# Altium PCB LEDPanel.PcbDoc
Units mm, origin at the board's own origin, x right, y up, seen from the top; angles counter-clockwise.
Board outline 99.44 x 62.86 mm, 4 copper layers (Top Layer, Mid Layer 1, Mid Layer 2, Bottom Layer), stack 1.57 mm thick; 52 components, 27 nets, 155 pads, 123 vias.
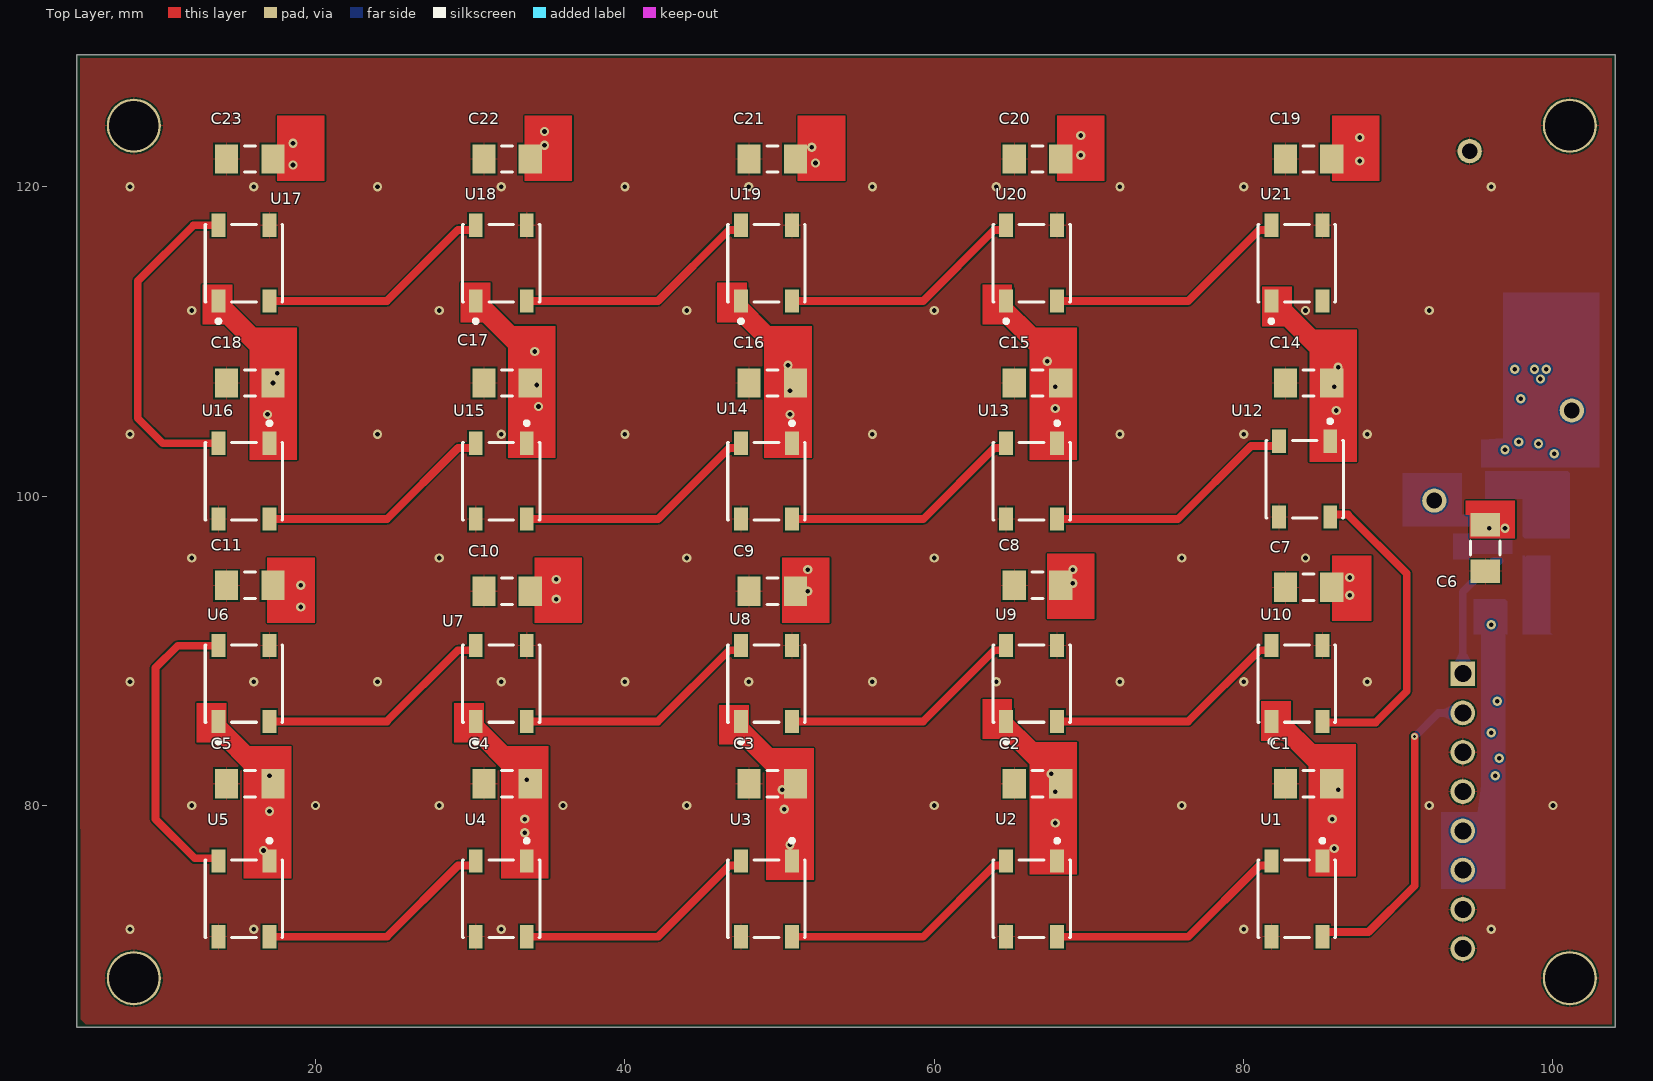
[diagram p0: Top Layer view]
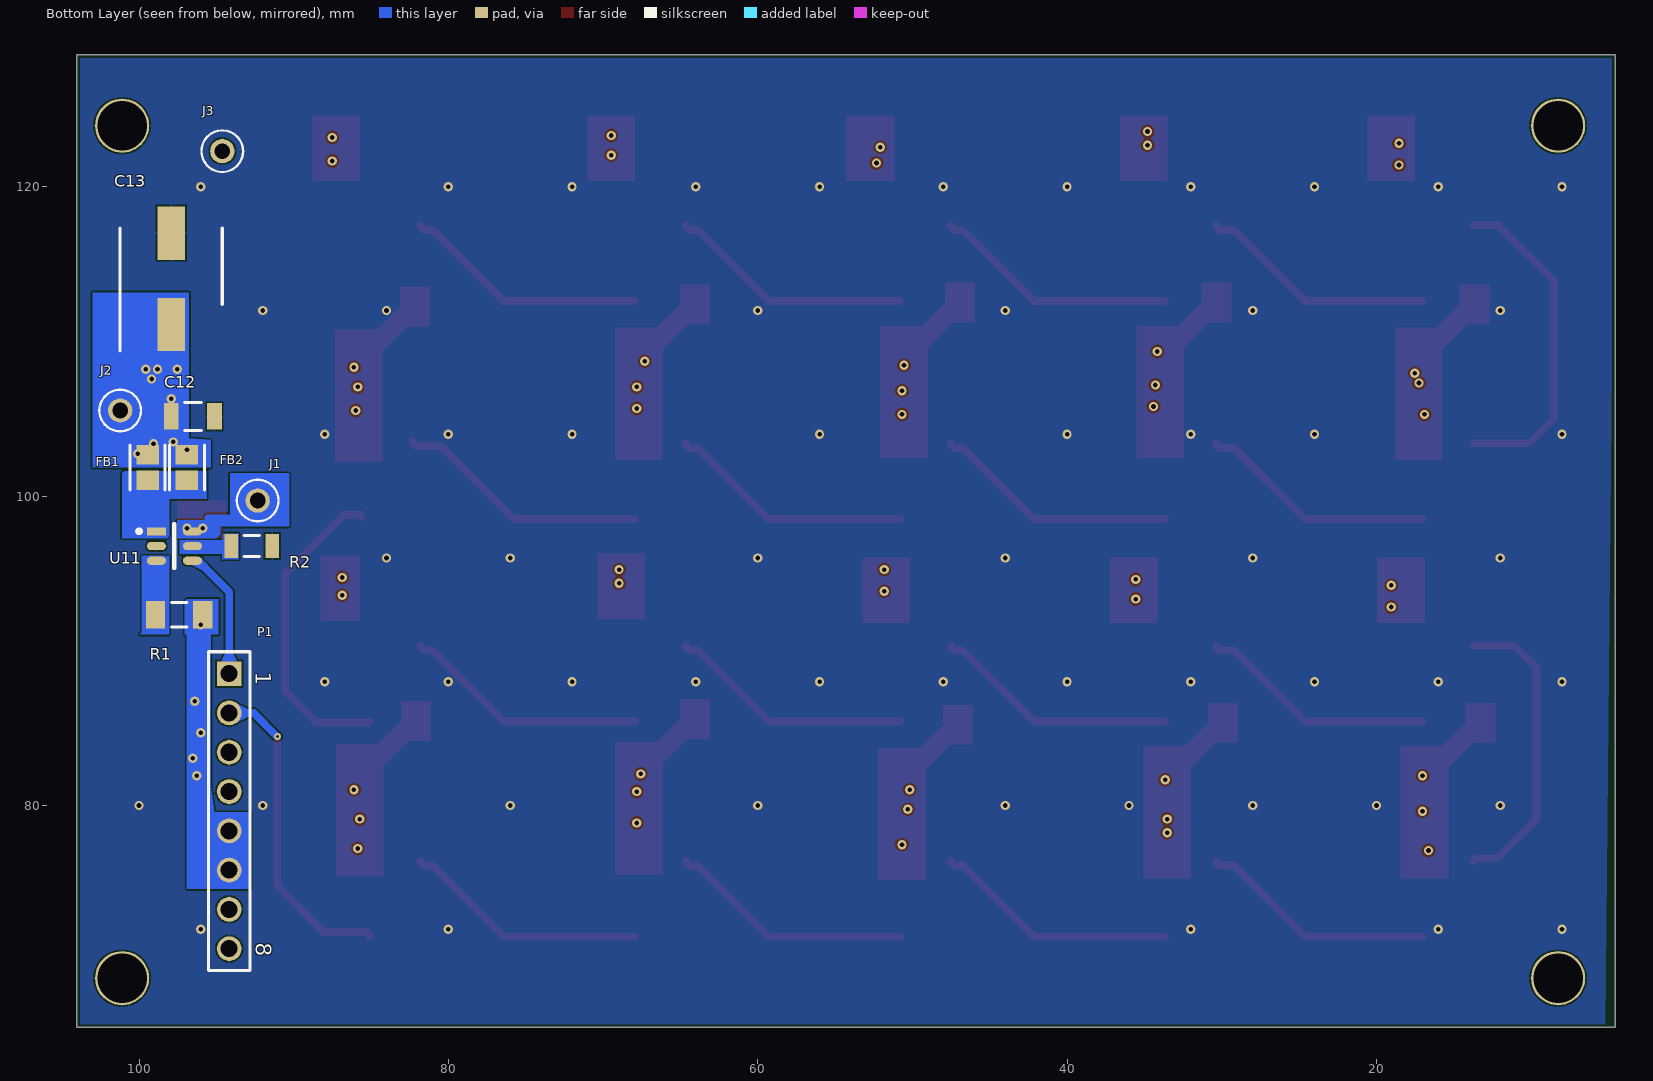
[diagram p1: Bottom Layer view, seen from below]
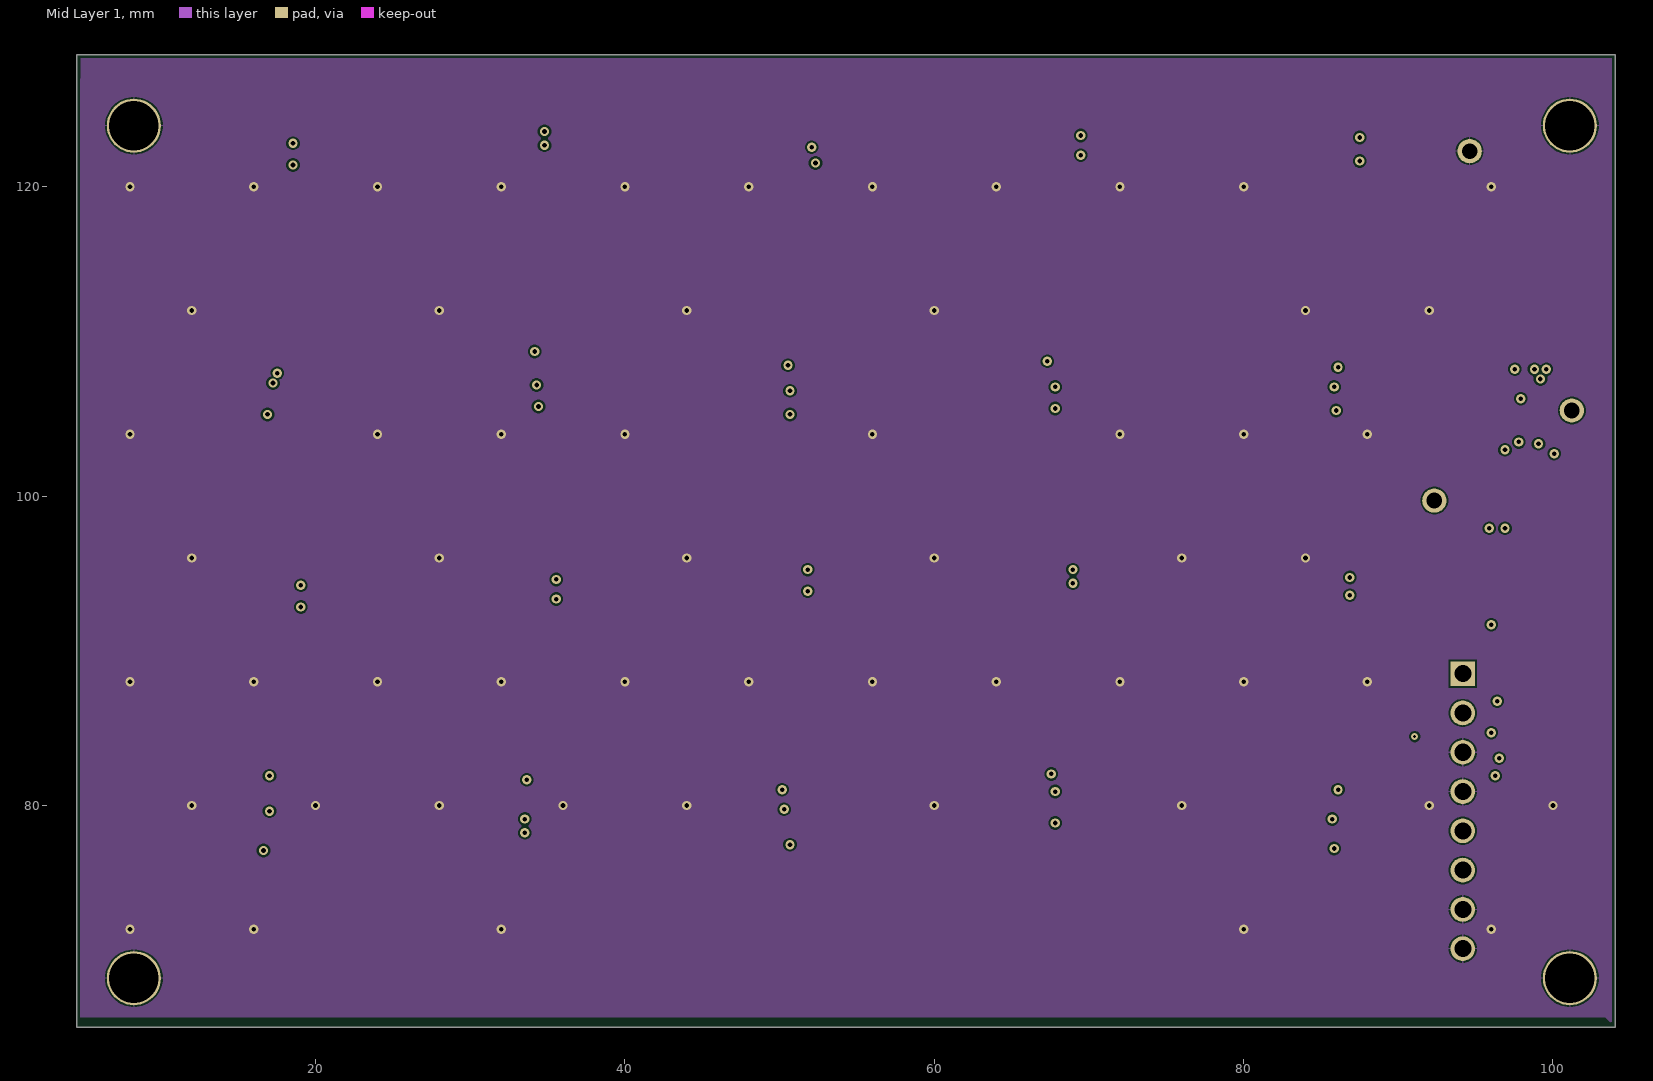
[diagram p2: Mid Layer 1]
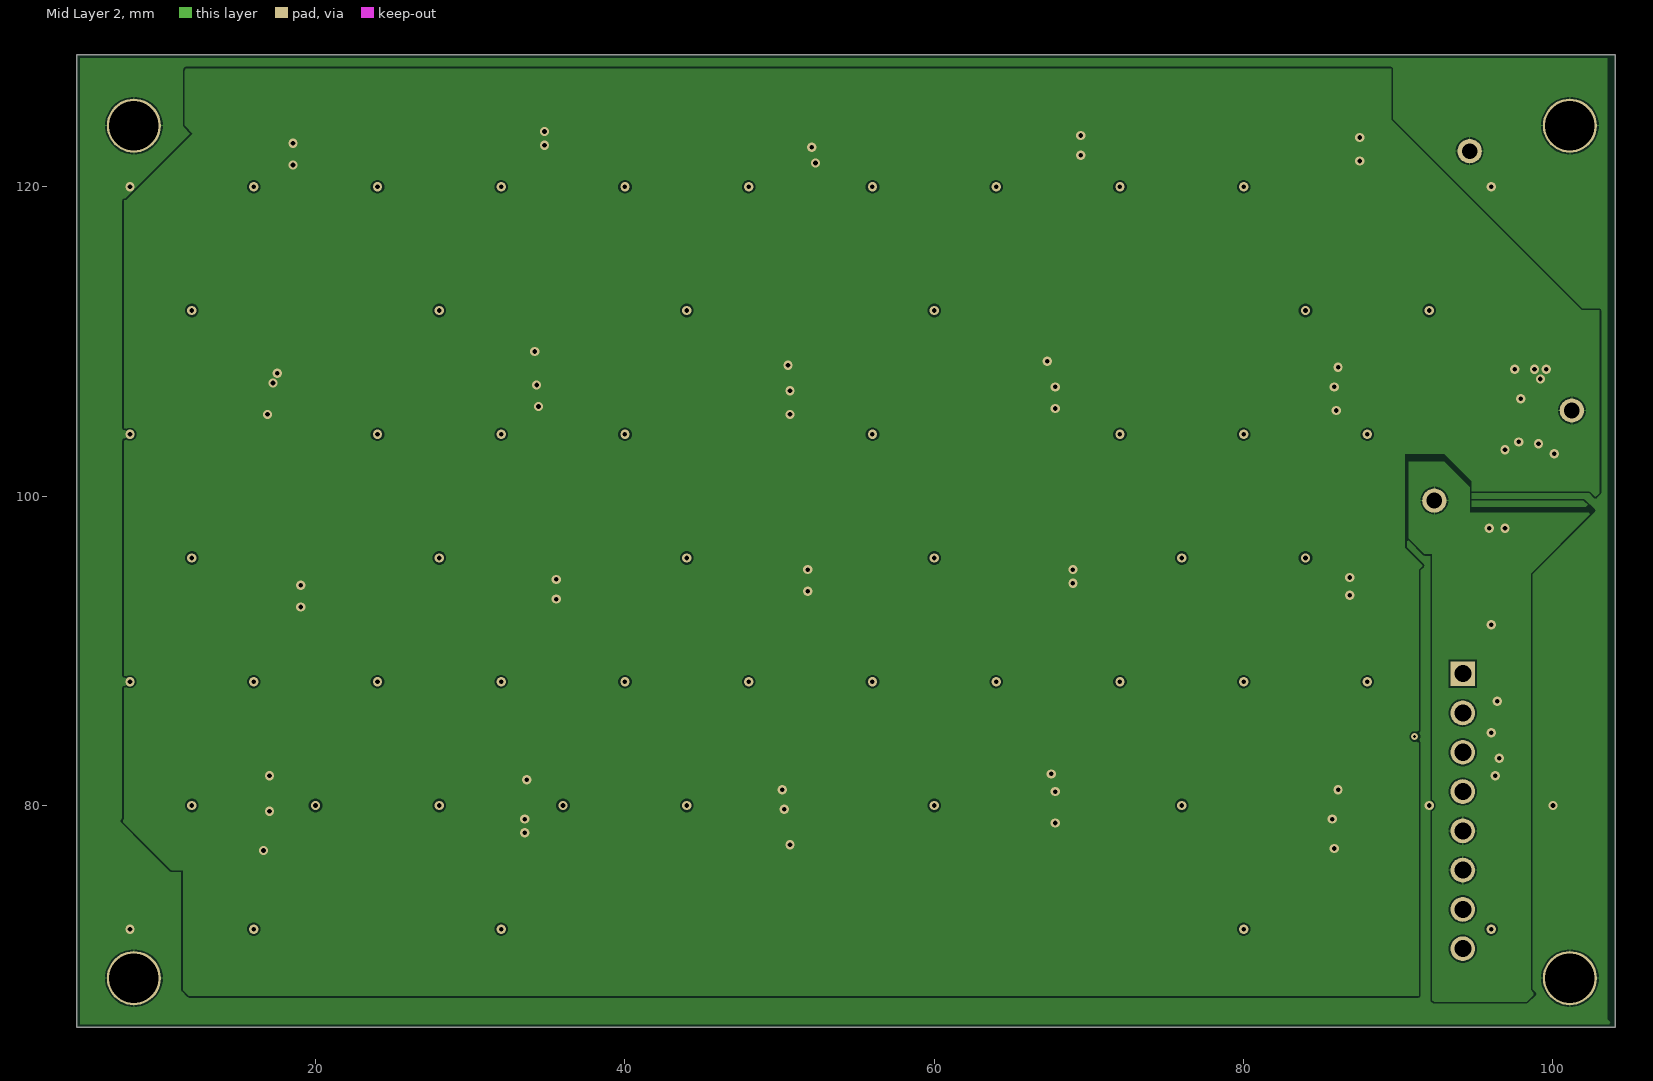
[diagram p3: Mid Layer 2]
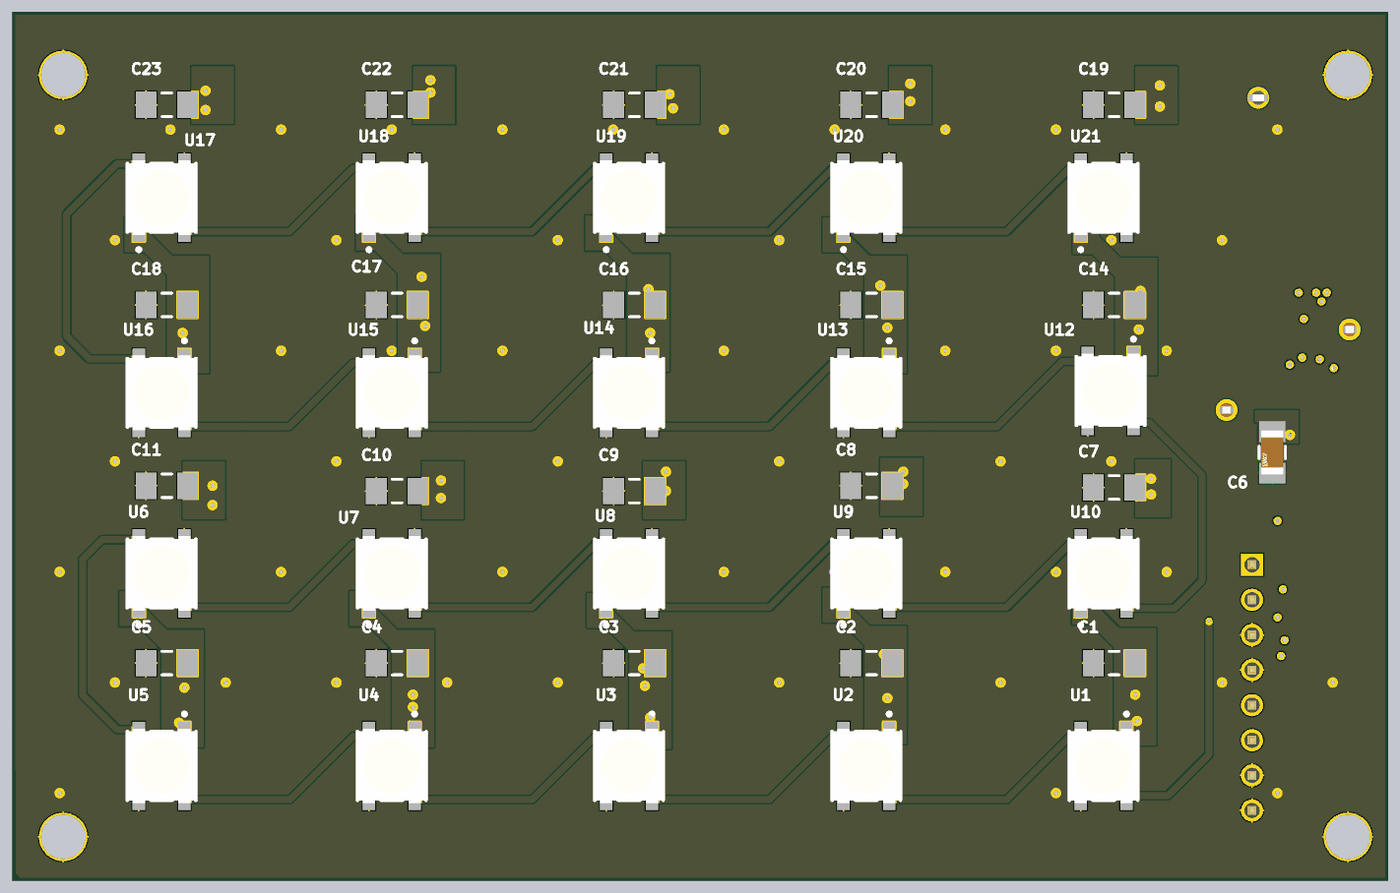
[diagram p4: 3D render of the assembled board from above, using the file's embedded part models]
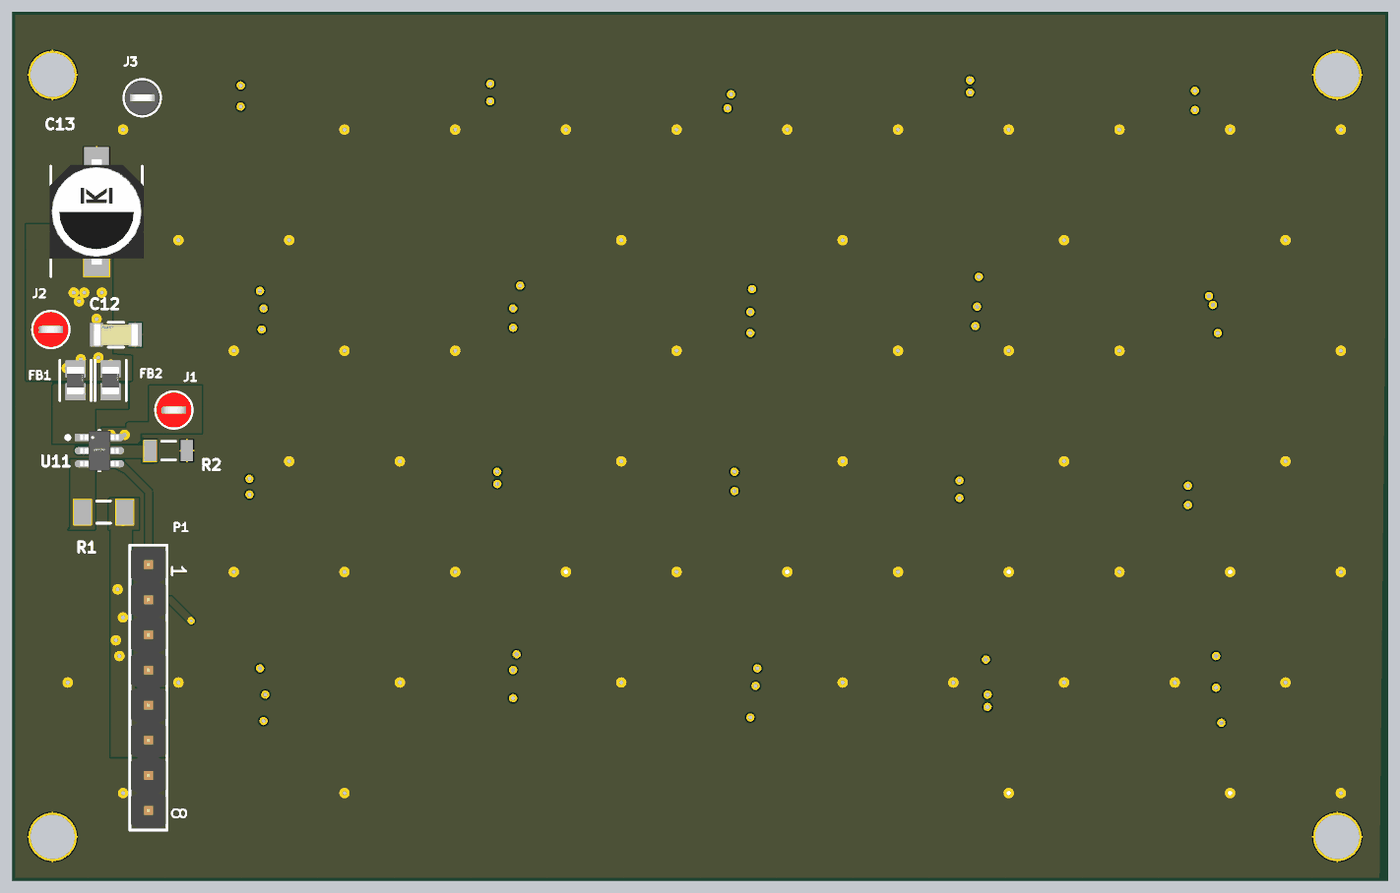
[diagram p5: 3D render of the assembled board from below, using the file's embedded part models]

## Layer stack, top to bottom
Top Solder: solder mask 0.0127, Solder Resist, Dk 3.8
Top Layer: signal copper 0.035
Dielectric 1: prepreg 0.1, 2313, Dk 4.05
Mid Layer 1: signal copper 0.0175
Core: core 1.265, FR-4, Dk 4.5
Mid Layer 2: signal copper 0.0175
Dielectric 2: prepreg 0.1, 2313, Dk 4.05
Bottom Layer: signal copper 0.035
Bottom Solder: solder mask 0.0127, Solder Resist, Dk 3.8

## Board outline
4.572,65.659 104.013,65.659 104.013,128.524 4.572,128.524

## Design rules (kind name [scope] priority, off if disabled: settings)
BoardOutlineClearance [All] p1: gap=0.2 ignorepadtopadclearanceinfootprint=FALSE
Clearance [All] p1: gap=0.102 ignorepadtopadclearanceinfootprint=FALSE except(0.127: Arc-Via Track-Via SMDPad-Via THPad-Via Via-Via Via-Fill Via-Poly Via-Region Via-Text; 0.25: Arc-Hole Track-Hole SMDPad-Hole THPad-Hole Via-Hole Fill-Hole Poly-Hole Region-Hole Text-Hole)
ComponentClearance [All] p1: gap=0.102 collisioncheckmode=3 verticalgap=0.102 showdistances=TRUE
DiffPairsRouting [All] p1: maxlimit=0.102 minlimit=0.102 mostfreqgap=0.102 toplayer_minwidth=0.102 toplayer_maxwidth=1816.048 toplayer_prefwidth=0.102 midlayer1_minwidth=0.102 midlayer1_maxwidth=1816.048 midlayer1_prefwidth=0.102 midlayer2_minwidth=0.102 midlayer2_maxwidth=1816.048 midlayer2_prefwidth=0.102 bottomlayer_minwidth=0.102 bottomlayer_maxwidth=1816.048 bottomlayer_prefwidth=0.102 maxuncoupledlength=12.7
Height [All] p1: minheight=0 maxheight=1816.048 prefheight=12.7
HoleSize [All] p1: absolutevalues=TRUE maxlimit=6.3 minlimit=0.2 maxpercent=80.000 minpercent=20.000
HoleToHoleClearance [All] p1: gap=0.25 allowstackedmicrovias=FALSE
MinimumAnnularRing [All] p1: minimumring=0.076
MinimumSolderMaskSliver [All] p1: minsoldermaskwidth=0
PlaneClearance [All] p1: clearance=0.102
PlaneConnect PlaneConnectPowerPads [InPadClass('PowerPads')] p1: planeconnectstyle=Direct reliefexpansion=0.508 reliefentries=4 reliefconductorwidth=0.254 reliefairgap=0.254
PlaneConnect [All] p2: pad.planeconnectstyle=Relief pad.reliefexpansion=0.3 pad.reliefentries=4 pad.reliefconductorwidth=0.102 pad.reliefairgap=0.102 via.planeconnectstyle=Direct via.reliefexpansion=0.3 via.reliefentries=4 via.reliefconductorwidth=0.127 via.reliefairgap=0.127
PolygonConnect PolygonConnectPowerPads [All vs (InPadClass('PowerPads'))] p1: connectstyle=Direct reliefconductorwidth=0.254 reliefentries=4 polygonreliefangle="90 Angle" airgapwidth=0.254
PolygonConnect [All] p2: thpad.connectstyle=Relief thpad.reliefconductorwidth=0.102 thpad.reliefentries=4 thpad.polygonreliefangle="90 Angle" thpad.airgapwidth=0.102 smdpad.connectstyle=Relief smdpad.reliefconductorwidth=0.102 smdpad.reliefentries=4 smdpad.polygonreliefangle="90 Angle" smdpad.airgapwidth=0.102 via.connectstyle=Direct via.reliefconductorwidth=0.127 via.reliefentries=4 via.polygonreliefangle="90 Angle" via.airgapwidth=0.127
RoutingVias [All] p1: holewidth=0.2 width=0.45 viastyle="Through Hole" minholewidth=0.2 minwidth=0.45 maxholewidth=6.3 maxwidth=6.55
SilkToSilkClearance [All] p1: silktosilkclearance=0
SilkToSolderMaskClearance [IsPad] p1: minsilkscreentomaskgap=0.102 clearancetoexposedcopper=TRUE
SolderMaskExpansion [All] p1: expansion=0.075 istentingtop=FALSE
Width [All] p1: maxlimit=1816.048 minlimit=0.102 preferedwidth=0.102
20 further rules are at their usual default settings.

## Classes and differential pairs
component class "digital led panel": C1 C2 C3 C4 C5 C6 C7 C8 C9 C10 C11 C12 C13 C14 C16 C17 C18 C19 C20 C21 C22 C23 FB1 FB2 J1 J2 J3 P1 R1 R2 U1 U2 U4 U5 U6 U7 U8 U9 U10 U11 U12 U13 U14 U15 U16 U18 U19 U20 U21

## Components (designator, comment, footprint, x,y, rotation, side; value= is the part's Value field where it differs from the comment)
C1 "100nF" KEMT-1206-2_M 84.201,81.407 r0 top
C2 "100nF" KEMT-1206-2_M 66.675,81.407 r0 top
C3 "100nF" KEMT-1206-2_M 49.53,81.407 r0 top
C4 "100nF" KEMT-1206-2_M 32.385,81.407 r0 top
C5 "100nF" KEMT-1206-2_M 15.748,81.407 r0 top
C6 "10uF" FP-1206-L_3_2_0_2-W_1_6_0-IPC_A 95.631,96.647 r270 top
C7 "100nF" KEMT-1206-2_M 84.201,94.107 r0 top
C8 "100nF" KEMT-1206-2_M 66.675,94.234 r0 top
C9 "100nF" KEMT-1206-2_M 49.53,93.853 r0 top
C10 "100nF" KEMT-1206-2_M 32.385,93.853 r0 top
C11 "100nF" KEMT-1206-2_M 15.748,94.234 r0 top
C12 "0.1uF" FP-C1206C-EB-MFG 96.52,105.156 r180 bottom value="0.10 μF"
C13 "100uF" CAPAE660X565N 97.917,114.046 r90 bottom
C14 "100nF" KEMT-1206-2_M 84.201,107.315 r0 top
C15 "100nF" KEMT-1206-2_M 66.675,107.315 r0 top
C16 "100nF" KEMT-1206-2_M 49.53,107.315 r0 top
C17 "100nF" KEMT-1206-2_M 32.385,107.315 r0 top
C18 "100nF" KEMT-1206-2_M 15.748,107.315 r0 top
C19 "100nF" KEMT-1206-2_M 84.201,121.793 r0 top
C20 "100nF" KEMT-1206-2_M 66.675,121.793 r0 top
C21 "100nF" KEMT-1206-2_M 49.53,121.793 r0 top
C22 "100nF" KEMT-1206-2_M 32.385,121.793 r0 top
C23 "100nF" KEMT-1206-2_M 15.748,121.793 r0 top
FB1 "15m" FP-BLM21-0_2-t0_85-e0_5-d-IPC_B 99.441,101.854 r90 bottom
FB2 "15m" FP-BLM21-0_2-t0_85-e0_5-d-IPC_B 96.901,101.854 r90 bottom
J1 "5000" FP-5000-MFG 92.329,99.713 r180 bottom
J2 "5000" FP-5000-MFG 101.219,105.537 r180 bottom
J3 "5001" FP-5001-MFG 94.615,122.301 r180 bottom
P1 "61300811121" 61300811121 94.167,79.632 r270 bottom
R1 "10K" RESC3116X65X40ML10T20 97.409,92.329 r180 bottom
R2 "3.4K" RESC3216X70X50LL05T20 92.71,96.774 r0 bottom
U1 "1655" ADA-RGB-1655_V 83.439,73.969 r270 top
U2 "1655" ADA-RGB-1655_V 66.294,73.969 r270 top
U3 "1655" ADA-RGB-1655_V 49.149,73.969 r270 top
U4 "1655" ADA-RGB-1655_V 32.004,73.969 r270 top
U5 "1655" ADA-RGB-1655_V 15.367,73.969 r270 top
U6 "1655" ADA-RGB-1655_V 15.367,87.884 r90 top
U7 "1655" ADA-RGB-1655_V 32.004,87.884 r90 top
U8 "1655" ADA-RGB-1655_V 49.149,87.884 r90 top
U9 "1655" ADA-RGB-1655_V 66.294,87.884 r90 top
U10 "1655" ADA-RGB-1655_V 83.439,87.884 r90 top
U11 "AP22615AWU-7" FP-TSOT26-IPC_B 97.709,96.774 r180 bottom
U12 "1655" ADA-RGB-1655_V 83.947,101.092 r270 top
U13 "1655" ADA-RGB-1655_V 66.294,100.965 r270 top
U14 "1655" ADA-RGB-1655_V 49.149,100.965 r270 top
U15 "1655" ADA-RGB-1655_V 32.004,100.965 r270 top
U16 "1655" ADA-RGB-1655_V 15.367,100.965 r270 top
U17 "1655" ADA-RGB-1655_V 15.367,115.062 r90 top
U18 "1655" ADA-RGB-1655_V 32.004,115.062 r90 top
U19 "1655" ADA-RGB-1655_V 49.149,115.062 r90 top
U20 "1655" ADA-RGB-1655_V 66.294,115.062 r90 top
U21 "1655" ADA-RGB-1655_V 83.439,115.062 r90 top

## Footprints (in the part's own frame and the unit in brackets; to place one, negate y for a bottom-side part, rotate by r counter-clockwise, add the part's x,y. Pads: shape width x height; smd on the part's side, far side on the other; paste and mask are expansions set on the pad)
61300811121 [mm] "Pin Header, pitch 2.54 mm, THT, Vertical, single row, 8p"
  rect 1.6x1.6 hole 1.1: 1(-8.89,0)
  round 1.6 hole 1.1: 2(-6.35,0) 3(-3.81,0) 4(-1.27,0) 5(1.27,0) 6(3.81,0) 7(6.35,0) 8(8.89,0)
  silkscreen extent -10.31,-1.35 10.31,1.35, body extent -10.16,-1.27 10.16,1.27, height 8.57
ADA-RGB-1655_V [mm] "SMD, 4-Leads, Body 5x5mm"
  rect 1.5x0.9 smd: 1(-2.45,1.65) 2(-2.45,-1.65) 3(2.45,-1.65) 4(2.45,1.65)
  silkscreen extent -3.87,-2.5 2.5,2.5, body extent -2.7,-2.5 2.7,2.5, height 1.68
CAPAE660X565N [mm]
  rect 3.45x1.8 smd: 1(-2.95,0) 2(2.95,0)
  silkscreen extent -4.67,-3.3 3.3,3.3, body extent -3.8,-3.4 3.8,3.4, height 5.66
FP-1206-L_3_2_0_2-W_1_6_0-IPC_A [mm]
  rect 1.505x1.906 smd paste+0 mask+0: 1(-1.501,0) 2(1.501,0)
  silkscreen extent -0.45,-0.95 0.45,0.95, body extent -1.6,-0.8 1.6,0.8, height 2.29
FP-5000-MFG [mm]
  round 1.57 hole 1.02 paste-1000 mask+0: 1(0,0)
  silkscreen extent -1.35,-1.34 1.35,1.34, body extent -1.27,-1.26 1.27,1.26, height 6.32
FP-5001-MFG [mm]
  round 1.57 hole 1.016 paste-1000 mask+0: 1(0,0)
  silkscreen extent -1.35,-1.34 1.35,1.34, body extent -1.27,-1.27 1.27,1.27, height 4.72
FP-BLM21-0_2-t0_85-e0_5-d-IPC_B [mm]
  rect 1.255x1.456 smd paste+0 mask+0: 1(-0.826,0) 2(0.826,0)
  silkscreen extent -1.45,-1.13 1.45,1.13, body extent -1,-0.63 1,0.63, height 1.05
FP-C1206C-EB-MFG [mm]
  rect 0.95x1.7 smd paste+0 mask+0: 1(-1.4,0) 2(1.4,0)
  silkscreen extent -0.55,-0.9 0.55,0.9, body extent -1.6,-0.8 1.6,0.8, height 0.88
FP-TSOT26-IPC_B [mm]
  rect 1.24x0.526 smd paste+0 mask+0: 1(-1.165,0.95)
  rrect100% 1.24x0.526 smd paste+0 mask+0: 2(-1.165,0) 3(-1.165,-0.95) 4(1.166,-0.95) 5(1.166,0) 6(1.166,0.95)
  silkscreen extent -2.41,-1.45 0.05,1.45, body extent -1.4,-1.45 1.4,1.45, height 1
KEMT-1206-2_M [mm] "SMD, 2-Leads, Body 3.4x1.8mm, IPC Low Density"
  rect 1.5x1.9 smd: 1(-1.5,0) 2(1.5,0)
  silkscreen extent -0.35,-0.85 0.35,0.85, body extent -1.7,-0.9 1.7,0.9, height 0.88
RESC3116X65X40ML10T20 [mm] "Chip Resistor, 2-Leads, Body 3.10x1.60mm, IPC Low Density"
  rect 1.25x1.8 smd: 1(-1.525,0) 2(1.525,0)
  silkscreen extent -0.5,-0.8 0.5,0.8, body extent -1.6,-0.85 1.6,0.85, height 0.65
RESC3216X70X50LL05T20 [mm] "Chip Resistor, 2-Leads, Body 3.20x1.60mm, IPC High Density"
  rect 0.9x1.55 smd: 1(-1.325,0) 2(1.325,0)
  silkscreen extent -0.5,-0.67 0.5,0.67, body extent -1.63,-0.82 1.62,0.82, height 0.7

## Part data
C1 C2 C3 C4 C5 C7 C8 C9 C10 C11 C14 C15 C16 C17 C18 C19 C20 C21 C22 C23: library part CMP-1037-04202-2, "CAP, Ceramic, 0.1 uF, +/- 10%, 50 V, -55 to 125 degC, 1206 (3216 Metric), RoHS, Tape and Reel", Capacitance=0.1µF, Capacitance Tolerance=±10%, Capacitor Case Style=1206[3216Metric], Dielectric Characteristic=X7R, Manufacturer=Kemet, Operating Temperature Max=125degC, Operating Temperature Min=-55degC, Package Description="2-Leads SMD, Body 3.2 x 1.6 mm", Package Reference=1206-2, Voltage Rating=50V, Datasheet URL=https://datasheet.ciiva.com/6125/1725438-6125494.pdf, Datasheet Version=Jul-13, Manufacturer URL=http://www.kemet.com/, Packaging=Tape&Reel, Product Range=KEMET-CSeries, SVHC=ToBeAdvised
C6: library part CMP-04427-021870-1, "General Purpose Ceramic Capacitor, 1206, 10uF, 10%, X5R, 15%, 10V", Case Code (Imperial)=1206, Case Code (Metric)=3216, Dielectric=X5R, Max Operating Temperature=85°C, Min Operating Temperature=-55°C, Package Quantity=1, Tolerance=10%, Voltage=10V, Capacitance=10uF, Case/Package=1206, Construction=Flat, Contact Plating=Tin, Depth=1.6mm, Height=0.07mm, Lead Free="Lead Free", Length=3.2mm, Mount="Surface Mount", Number of Pins=2, Packaging="Tape and Reel", Radiation Hardening=No, REACH SVHC="No SVHC", RoHS Compliant=Yes, Series=-, Size=1.78mm, Termination=SMD/SMT, Thickness=0.07inch, Voltage Rating=10V, Voltage Rating (DC)=10V, Width=0.063inch
C12: library part CMP-03020-000153-1, "CAP CER 0.1UF 100V X7R 1206", Capacitance="0.10 μF", Manufacturer=KEMET, Manufacturer Part Number=C1206C104K1RACTU, Package=C1206C-EB, Temperature="-55°C to +150°C", Temperature Characteristic=X7R, Temperature Coefficient=15%, Temperature Range High=+150°C, Temperature Range Low=-55°C, Tolerance=0.1, Voltage Rating="100 V", Automotive=Yes, Automotive Grade="Grade 0", Category=Cap, ComponentLink2Description=Datasheet, ComponentLink2URL=https://content.kemet.com/datasheets/KEM_C1007_X8R_ULTRA_150C_SMD.pdf, Device Class L1="Passive Components", Device Class L2=Capacitors, Device Class L3="Ceramic Capacitors", Digikey Description="CAP CER 0.1UF 100V X7R 1206", Height=0.88mm, Ipc Land Pattern Name=CAPC320160X78, Lead Free=Yes, Material=Ceramic, Mouser Description="CAP CER 0.1UF 100V X7R 1206", Octopart=https://octopart.com/c1206c104k1ractu-kemet-89521, RoHS=TRUE
C13: library part EEV107M016S9GAA, "Capacitor Polarised", Manufacturer_Name=KEMET, Mouser Part Number=80-EEV107M016S9GAA, Arrow Part Number=EEV107M016S9GAA, Arrow Price/Stock=https://www.arrow.com/en/products/eev107m016s9gaa/kemet-corporation?region=nac, Datasheet Link=https://content.kemet.com/datasheets/KEM_A4002_EEV.pdf, Height=5.65mm, Manufacturer_Part_Number=EEV107M016S9GAA, Mouser Price/Stock=https://www.mouser.co.uk/ProductDetail/KEMET/EEV107M016S9GAA?qs=E9QF1UCAUX60VYOwNzsOEA%3D%3D
FB1 FB2: library part CMP-06046-001820-1, "Chip Ferrite Bead, 0805, 30Ω @ 100MHz, 0.014Ω, , 4A", Case Code (Imperial)=0805, Case Code (Metric)=2012, Current Rating=3A, DC Resistance (DCR)=14mR, DC Resistance-Max=15MR, Max Current Rating=4A, Max Operating Temperature=125°C, Min Operating Temperature=-55°C, Package Quantity=4000, Ratings=AEC-Q200, Test Frequency=100MHz, Tolerance=25%, Case/Package=0805, Core Material=Ferrite, Depth=1.45mm, Height=0.041inch, Impedance=30R, Lead Free="Lead Free", Length=2mm, Material=Steel, Max DC Current=3A, Mount="Surface Mount", Number of Circuits=1, Number of Lines=1, Packaging="Tape and Reel", REACH SVHC="No SVHC", RoHS Compliant=Yes, Series="EMIFIL®, BLM21P", Shielding=Unshielded, Termination=SMD/SMT, Weight=0.000194oz, Width=1.25mm
J1 J2: library part CMP-19636-000027-1, "PC TEST POINT MINIATURE RED", Color=Red, Flammability Rating="UL94 V-0", Package Quantity=100, Body Material=Bronze, Contact Material=Bronze, Contact Plating=Tin, Height=0.3inch, Hole Diameter=1.6mm, Housing Color=Red, Inside Diameter=1.27mm, Insulation=Insulated, Lead Free="Lead Free", Length=7.62mm, Material=Nylon, Mount=PCB, Number of Contacts=1, Number of Ports=1, Orientation=Straight, Outside Diameter=2.54mm, Packaging=Bulk, Plating=Silver, REACH SVHC="No SVHC", RoHS Compliant=Yes, Series=THM
J3: library part CMP-2000-05181-2, "PC TEST POINT MINIATURE BLACK", Color=Black, Flammability Rating="UL94 V-0", Package Quantity=100, Body Material=Bronze, Contact Material=Bronze, Contact Plating=Silver, Diameter=2.54mm, Height=0.3inch, Hole Diameter=1.6mm, Housing Color=Black, Inside Diameter=1.27mm, Insulation=Insulated, Insulation Material=Nylon, Lead Free="Lead Free", Length=7.62mm, Material=Nylon, Mount="Through Hole", Number of Contacts=1, Number of Ports=1, Orientation=Straight, Outside Diameter=2.54mm, Packaging=Bulk, Plating=Silver, REACH SVHC="No SVHC", RoHS Compliant=Yes, Series=THM, Termination="Through Hole"
P1: library part CMP-1502-01076-1, "THT Vertical Pin Header WR-PHD, Pitch 2.54 mm, Single Row, 8 pins", Contact Resistance=20mOhm, Manufacturer="Wurth Elektronik", Operating Temperature=-40to105degC, Rated Current=3A, Withstanding Voltage=500VAC, Working Voltage=250VAC, Datasheet URL=https://katalog.we-online.de/em/datasheet/6130xx11121.pdf, Gender=Male, Manufacturer URL=http://www.we-online.de, Mounting Technology=THT, Orientation=Vertical, Package Reference=61300811121, Packaging=Bag, Part Number=61300811121, Pin Number=8, Pitch=2.54mm, Publisher=WurthElektronik, Row Number=Single
R1: library part CMP-1014-00623-2, "Chip Resistor, 10 KOhm, +/- 1%, 0.25 W, -55 to 155 degC, 1206 (3216 Metric), RoHS, Tape and Reel", Case Code (Imperial)=1206, Case Code (Metric)=3216, Manufacturer=Yageo, Max Operating Temperature=155degC, Min Operating Temperature=-55degC, Package Description="2-Pin Surface Mount Device, Body 3.1 x 1.6 mm", Package Quantity=5000, Package Reference=1206.0, Power Rating=250mW, Resistance=10KOhm, Temperature Coefficient=100ppm/degreesC, Tolerance=1%, Voltage Rating=200V, Case/Package=1206, Composition=ThickFilm, Datasheet URL=http://www.yageo.com/NewPortal/yageodocoutput?fileName=/pdf/R-Chip/PYu-RC_Group_51_RoHS_L_5.pdf, Datasheet Version="Rev. 5, 10/2016", Depth=1.6mm, Height=0.55mm, Lead Free=LeadFree, Length=3.1mm, Manufacturer URL=http://www.yageo.com/, Military Standard=Not, Packaging=TapeandReel, REACH SVHC=Unknown, RoHSCompliant=true, Termination=SMD/SMT, Width=1.6mm
R2: library part CMP-2003-00314-1, Manufacturer=Panasonic, Part Number=ERJ-8ENF3401V
U1 U2 U3 U4 U5 U6 U7 U8 U9 U10 U12 U13 U14 U15 U16 U17 U18 U19 U20 U21: library part CMP-2000-05026-1, "Intelligent Control LED Integrated Light Source, 3.5 to 5.3 V, -25 to 80 degC, 4-Pin SMD, RoHS, Tape and Reel", Color=Red,Green,Blue(RGB), Manufacturer=Adafruit-Industries-LLC, Package Description="4-Pin Surface Mount Device, Body 5 x 5 mm", Category=Optoelectronics, Configuration=Discrete, Controller Type=-, Datasheet URL=http://datasheet.octopart.com/ADA1655-Adafruit-Industries-datasheet-32028139.pdf, Datasheet Version=May-13, Family=Addressable,Specialty, Interface=-, Manufacturer URL=https://www.adafruit.com/, Mounting Type=SurfaceMount, Number of LEDs=10, Package Reference=1655, Series=Neopixel, Size / Dimension=5.00mmLx5.00mmW, Utilized LED=WS2812(5050)
U11: library part CMP-12757-000023-1, "IC PWR SWTCH N/P-CHAN 1:1 TSOT26", RoHS Compliant=Yes

## Free pads (board coordinates)
  round 3.5 hole 3.2: 1(8.255,123.952) 2(8.255,68.834) 3(101.092,68.834) 4(101.092,123.952)

## Via types
v1: diameter 0.6, hole 0.3, Top Layer to Bottom Layer, 66 vias
v2: diameter 0.6/0.6/0.6/0.6 (per signal layer), hole 0.3, Top Layer to Bottom Layer, 56 vias
v3: diameter 0.45, hole 0.2, Top Layer to Bottom Layer, 1 vias

## Nets (pads, with @x,y where several pads share a name; then routed paths per layer and width w, separated by ;. In a path a pad name is that pad's centre, name@x,y a point inside that pad or via, vN(x,y) a via of type N, cw(c..) or ccw(c..) an arc to the next point about the centre after c; other vN are vias at no path point)
DIN: P1.2 U1.4 | length 20.8
  Top Layer w0.5: U1.4 85.089,71.619 85.289,71.819 88.075,71.819 91.059,74.803 v3(91.059,84.455)
  Bottom Layer w0.5: v3(91.059,84.455) 92.586,85.982 P1.2
DMOS: P1.1 U11.4 | length 8.5
  Bottom Layer w0.5: P1.1 94.167,93.805 96.186,95.824 U11.4
GND: C1.1 C2.1 C3.1 C4.1 C5.1 C6.2 C7.1 C8.1 C9.1 C10.1 C11.1 C12.2 C13.2 C14.1 C15.1 C16.1 C17.1 C18.1 C19.1 C20.1 C21.1 C22.1 C23.1 J3.1 P1.3 P1.4 P1.7 P1.8 pad.1 pad.2 pad.3 pad.4 R2.1 U1.3 U2.3 U3.3 U4.3 U5.3 U6.3 U7.3 U8.3 U9.3 U10.3 U11.2 U12.3 U13.3 U14.3 U15.3 U16.3 U17.3 U18.3 U19.3 U20.3 U21.3
  other v2: 8,72 16,72 32,72 80,72 96,72 12,80 20,80 28,80 36,80 44,80 60,80 76,80 92,80 100,80 8,88 16,88 24,88 32,88 40,88 48,88 56,88 64,88 72,88 80,88 88,88 12,96 28,96 44,96 60,96 76,96 84,96 8,104 24,104 32,104 40,104 56,104 72,104 80,104 88,104 12,112 28,112 44,112 60,112 84,112 92,112 8,120 16,120 24,120 32,120 40,120 48,120 56,120 64,120 72,120 80,120 96,120
NetFB1_1: FB1.1 FB2.1 U11.1
NetR1_1: R1.1 U11.3
NetR2_2: R2.2 U11.5
NetU1_2: U1.2 U2.4 | length 15.9
  Top Layer w0.5: U2.4 76.427,71.519 81.027,76.119 81.589,76.119 81.789,76.319 U1.2
NetU2_2: U2.2 U3.4 | length 15.9
  Top Layer w0.5: U3.4 59.282,71.519 63.882,76.119 64.444,76.119 64.644,76.319 U2.2
NetU3_2: U3.2 U4.4 | length 15.9
  Top Layer w0.5: U4.4 42.137,71.519 46.737,76.119 47.299,76.119 47.499,76.319 U3.2
NetU4_2: U4.2 U5.4 | length 15.4
  Top Layer w0.5: U5.4 24.611,71.519 29.211,76.119 30.154,76.119 30.354,76.319 U4.2
NetU5_2: U5.2 U6.4 | length 19.6
  Top Layer w0.5: U5.2 13.555,76.581 12.192,76.581 9.652,79.121 9.652,88.9 11.086,90.334 U6.4
NetU6_2: U6.2 U7.4 | length 15.4
  Top Layer w0.5: U6.2 24.611,85.434 29.211,90.034 30.154,90.034 30.354,90.234 U7.4
NetU7_2: U7.2 U8.4 | length 15.9
  Top Layer w0.5: U7.2 42.137,85.434 46.737,90.034 47.299,90.034 47.499,90.234 U8.4
NetU8_2: U8.2 U9.4 | length 15.9
  Top Layer w0.5: U8.2 59.282,85.434 63.882,90.034 64.444,90.034 64.644,90.234 U9.4
NetU9_2: U9.2 U10.4 | length 15.9
  Top Layer w0.5: U9.2 76.427,85.434 81.027,90.034 81.589,90.034 81.789,90.234 U10.4
NetU10_2: U10.2 U12.4 | length 20.5
  Top Layer w0.5: U10.2 85.153,85.37 88.535,85.37 90.551,87.386 90.551,94.996 86.741,98.806 85.761,98.806 U12.4
NetU12_2: U12.2 U13.4 | length 16.5
  Top Layer w0.5: U13.4 75.746,98.515 80.473,103.242 82.097,103.242 82.297,103.442 U12.2
NetU13_2: U13.2 U14.4 | length 15.9
  Top Layer w0.5: U14.4 59.282,98.515 63.882,103.115 64.444,103.115 64.644,103.315 U13.2
NetU14_2: U14.2 U15.4 | length 15.9
  Top Layer w0.5: U15.4 42.137,98.515 46.737,103.115 47.299,103.115 47.499,103.315 U14.2
NetU15_2: U15.2 U16.4 | length 15.4
  Top Layer w0.5: U16.4 24.611,98.515 29.211,103.115 30.154,103.115 30.354,103.315 U15.2
NetU16_2: U16.2 U17.4 | length 21.5
  Top Layer w0.5: U16.2 10.123,103.415 8.509,105.029 8.509,113.909 12.112,117.512 U17.4
NetU17_2: U17.2 U18.4 | length 15.4
  Top Layer w0.5: U17.2 24.611,112.612 29.211,117.212 30.154,117.212 30.354,117.412 U18.4
NetU18_2: U18.2 U19.4 | length 15.9
  Top Layer w0.5: U18.2 42.137,112.612 46.737,117.212 47.299,117.212 47.499,117.412 U19.4
NetU19_2: U19.2 U20.4 | length 15.9
  Top Layer w0.5: U19.2 59.282,112.612 63.882,117.212 64.444,117.212 64.644,117.412 U20.4
NetU20_2: U20.2 U21.4 | length 15.9
  Top Layer w0.5: U20.2 76.427,112.612 81.027,117.212 81.589,117.212 81.789,117.412 U21.4
VDD: C6.1 J1.1 P1.5 P1.6 R1.2 U11.6
  other v1: 96.266,81.915 96.52,83.058 96.012,84.709 96.393,86.741 96.012,91.694 95.885,97.917 96.901,97.917
VOUT: C1.2 C2.2 C3.2 C4.2 C5.2 C7.2 C8.2 C9.2 C10.2 C11.2 C12.1 C13.1 C14.2 C15.2 C16.2 C17.2 C18.2 C19.2 C20.2 C21.2 C22.2 C23.2 FB1.2 FB2.2 J2.1 U1.1 U2.1 U3.1 U4.1 U5.1 U6.1 U7.1 U8.1 U9.1 U10.1 U12.1 U13.1 U14.1 U15.1 U16.1 U17.1 U18.1 U19.1 U20.1 U21.1
  other v1: 16.637,77.089 85.852,77.216 50.673,77.47 33.528,78.232 67.818,78.867 33.528,79.121 85.725,79.121 17.018,79.629 50.292,79.756 67.818,80.899 50.165,81.026 86.106,81.026 33.655,81.661 17.018,81.915 67.564,82.042 19.05,92.837 35.56,93.345 86.868,93.599 51.816,93.853 19.05,94.234 68.961,94.361 35.56,94.615 86.868,94.742 51.816,95.25 68.961,95.25 100.076,102.743 96.901,102.997 99.06,103.378 97.79,103.505 16.891,105.283 50.673,105.283 85.979,105.537 67.818,105.664 34.417,105.791 97.917,106.299 50.673,106.807 67.818,107.061 85.852,107.061 34.29,107.188 17.248,107.315 99.187,107.569 17.526,107.95 97.536,108.204 98.806,108.204 99.568,108.204 86.106,108.331 50.546,108.458 67.31,108.712 34.163,109.347 18.542,121.412 52.324,121.539 87.503,121.666 69.469,122.047 52.07,122.555 34.798,122.682 18.542,122.809 87.503,123.19 69.469,123.317 34.798,123.571
pads on no net: U21.2

## Polygon pours and split planes (outlines as drawn)
GND on Bottom Layer "GND_L04_P000" (solid, pour order 0): 4.572,128.524 104.267,128.524 104.521,128.27 104.394,128.143 104.394,65.659 5.207,65.659
GND on Mid Layer 1 "GND_L02_P001" (solid, pour order 1): 4.826,128.778 5.08,129.032 104.013,129.032 104.013,65.659 103.378,66.294 3.81,66.294
VDD on Mid Layer 2 "VDD_L03_P004" (solid, pour order 4): 92.329,67.31 98.298,67.31 98.806,67.818 98.552,68.072 98.552,94.996 102.489,98.933 94.615,98.933 94.615,100.584 92.964,102.235 90.678,102.235 90.678,97.282 91.694,96.266 92.202,96.266 92.202,67.31 92.329,67.183
GND on Mid Layer 2 "GND_L03_P005" (solid, pour order 5): 4.445,128.651 103.505,128.651 103.505,66.167 104.14,65.532 103.505,64.897 3.937,64.897
VOUT on Mid Layer 2 "VOUT_L03_P003" (solid, pour order 3): 11.176,127.762 11.303,127.635 89.535,127.635 89.535,124.333 101.854,112.014 102.997,112.014 102.997,100.203 102.108,99.314 94.742,99.314 94.742,100.965 92.964,102.743 90.424,102.743 90.424,96.647 91.567,95.504 91.313,95.25 91.313,67.691 11.811,67.691 11.43,68.072 11.43,75.819 10.668,75.819 7.493,78.994 7.62,79.121 7.62,119.126 7.747,119.126 12.065,123.444 11.557,123.952 11.557,127.508
GND on Top Layer "GND_L01_P002" (solid, pour order 2): 4.699,128.524 103.632,128.524 104.521,127.635 104.521,65.659 5.334,65.659 4.826,66.167

## Other copper
Top Layer:
  region net VOUT: 15.748,102.362 18.796,102.362 18.796,110.871 16.129,110.871 14.605,112.395 14.605,113.665 12.7,113.665 12.7,111.125 14.097,111.125 15.748,109.474
  region net VOUT: 15.367,75.311 18.415,75.311 18.415,83.82 15.748,83.82 14.224,85.344 14.224,86.614 12.319,86.614 12.319,84.074 13.716,84.074 15.367,82.423
  region net VOUT: 16.891,96.012 19.939,96.012 19.939,91.821 16.891,91.821
  region net VOUT: 17.526,124.587 20.574,124.587 20.574,120.396 17.526,120.396
  region net VOUT: 32.448,102.489 35.496,102.489 35.496,110.998 32.829,110.998 31.305,112.522 31.305,113.792 29.4,113.792 29.4,111.252 30.797,111.252 32.448,109.601
  region net VOUT: 32.004,75.311 35.052,75.311 35.052,83.82 32.385,83.82 30.861,85.344 30.861,86.614 28.956,86.614 28.956,84.074 30.353,84.074 32.004,82.423
  region net VOUT: 33.528,124.587 36.576,124.587 36.576,120.396 33.528,120.396
  region net VOUT: 34.163,96.012 37.211,96.012 37.211,91.821 34.163,91.821
  region net VOUT: 49.022,102.489 52.07,102.489 52.07,110.998 49.403,110.998 47.879,112.522 47.879,113.792 45.974,113.792 45.974,111.252 47.371,111.252 49.022,109.601
  region net VOUT: 49.149,75.184 52.197,75.184 52.197,83.693 49.53,83.693 48.006,85.217 48.006,86.487 46.101,86.487 46.101,83.947 47.498,83.947 49.149,82.296
  region net VOUT: 50.165,96.012 53.213,96.012 53.213,91.821 50.165,91.821
  region net VOUT: 51.181,124.587 54.229,124.587 54.229,120.396 51.181,120.396
  region net VOUT: 66.167,102.362 69.215,102.362 69.215,110.871 66.548,110.871 65.024,112.395 65.024,113.665 63.119,113.665 63.119,111.125 64.516,111.125 66.167,109.474
  region net VOUT: 66.167,75.565 69.215,75.565 69.215,84.074 66.548,84.074 65.024,85.598 65.024,86.868 63.119,86.868 63.119,84.328 64.516,84.328 66.167,82.677
  region net VOUT: 67.31,96.266 70.358,96.266 70.358,92.075 67.31,92.075
  region net VOUT: 67.945,124.587 70.993,124.587 70.993,120.396 67.945,120.396
  region net VOUT: 84.264,102.235 87.312,102.235 87.312,110.744 84.645,110.744 83.121,112.268 83.121,113.538 81.216,113.538 81.216,110.998 82.614,110.998 84.264,109.347
  region net VOUT: 84.201,75.438 87.249,75.438 87.249,83.947 84.582,83.947 83.058,85.471 83.058,86.741 81.153,86.741 81.153,84.201 82.55,84.201 84.201,82.55
  region net VOUT: 85.725,96.139 88.265,96.139 88.265,91.948 85.725,91.948
  region net VOUT: 85.725,124.587 88.773,124.587 88.773,120.396 85.725,120.396
  region net VDD: 94.361,99.695 97.536,99.695 97.536,97.282 94.615,97.282 94.615,98.806 94.361,98.806
Bottom Layer:
  region net VDD: 90.297,101.473 94.107,101.473 94.107,98.806 95.631,98.806 95.758,98.679 95.758,97.282 94.996,97.282 94.742,97.536 94.742,98.044 90.297,98.044
  region net VOUT: 95.377,103.632 95.377,101.854 102.997,101.854 102.997,113.157 96.774,113.157 96.774,103.732
  region net VDD: 95.504,98.425 97.536,98.425 97.536,97.282 95.504,97.282
  region net VDD: 94.869,93.345 96.901,93.345 97.028,93.218 97.028,91.059 94.869,91.059
  region net VDD: 95.377,93.281 96.901,93.281 96.901,90.17 96.901,74.612 92.773,74.612 92.773,79.566 95.132,79.566 95.377,81.28
  region net NetR2_2: 93.557,97.578 93.557,95.927 93.684,95.927 94.615,95.885 94.615,96.266 97.367,96.266 97.367,97.155 94.573,97.155 94.573,97.578
  region net NetR1_1: 98.171,96.012 98.298,96.139 99.822,96.139 99.822,91.186 99.949,91.059 98.044,91.059 98.044,96.139 98.171,96.139
  region net NetFB1_1: 95.631,101.6 100.965,101.6 101.092,101.473 101.092,97.282 98.171,97.282 98.044,97.409 98.044,99.822 95.631,99.822

## Text inside footprints (layer, text, board x,y; h text height)
P1: Bottom Overlay "8" at 92.467,71.122 h1.02 r90; Bottom Overlay "1" at 92.467,88.642 h1.02 r90